# Altium PCB TempController.PcbDoc
Units mil, origin at the board's own origin, x right, y up, seen from the top; angles counter-clockwise.
Board outline 2362.2 x 3260 mil, 2 copper layers (Top Layer, Bottom Layer); 38 components, 36 nets, 136 pads, 5 vias.
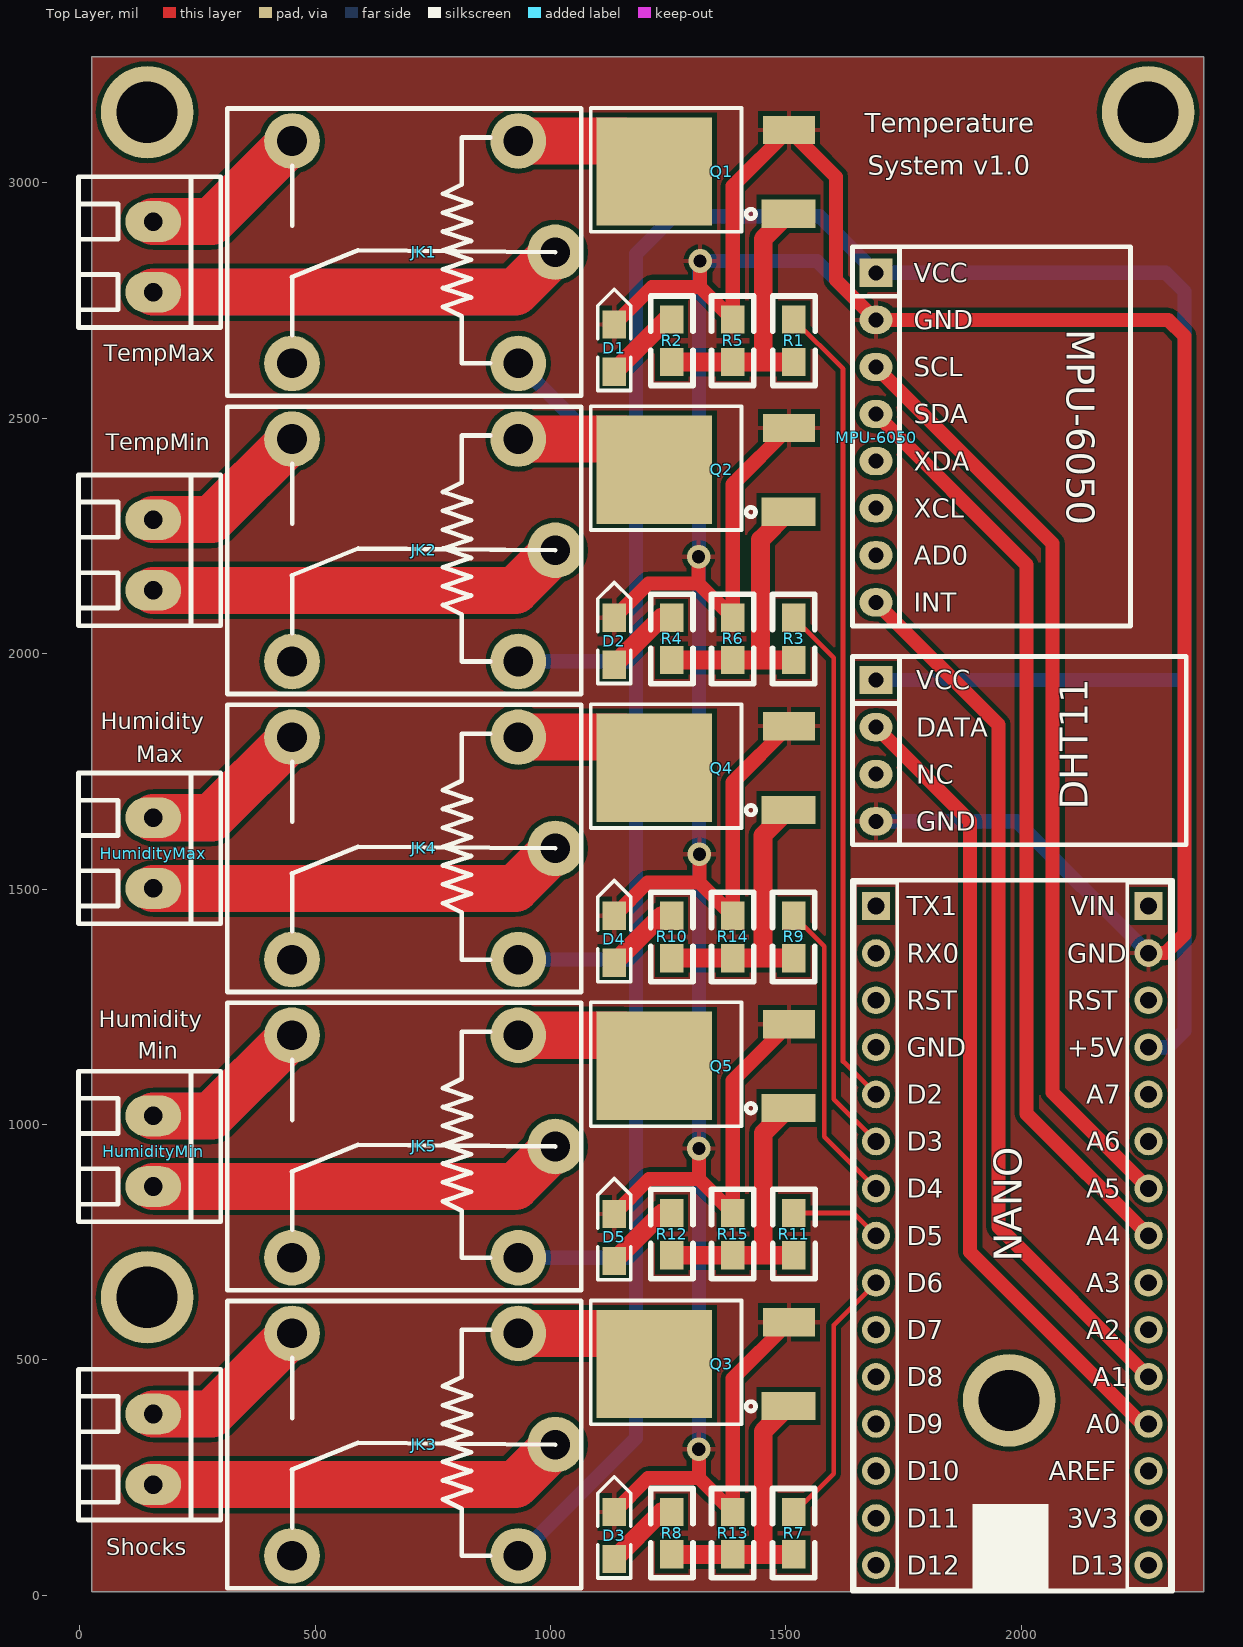
[diagram p0: Top Layer view]
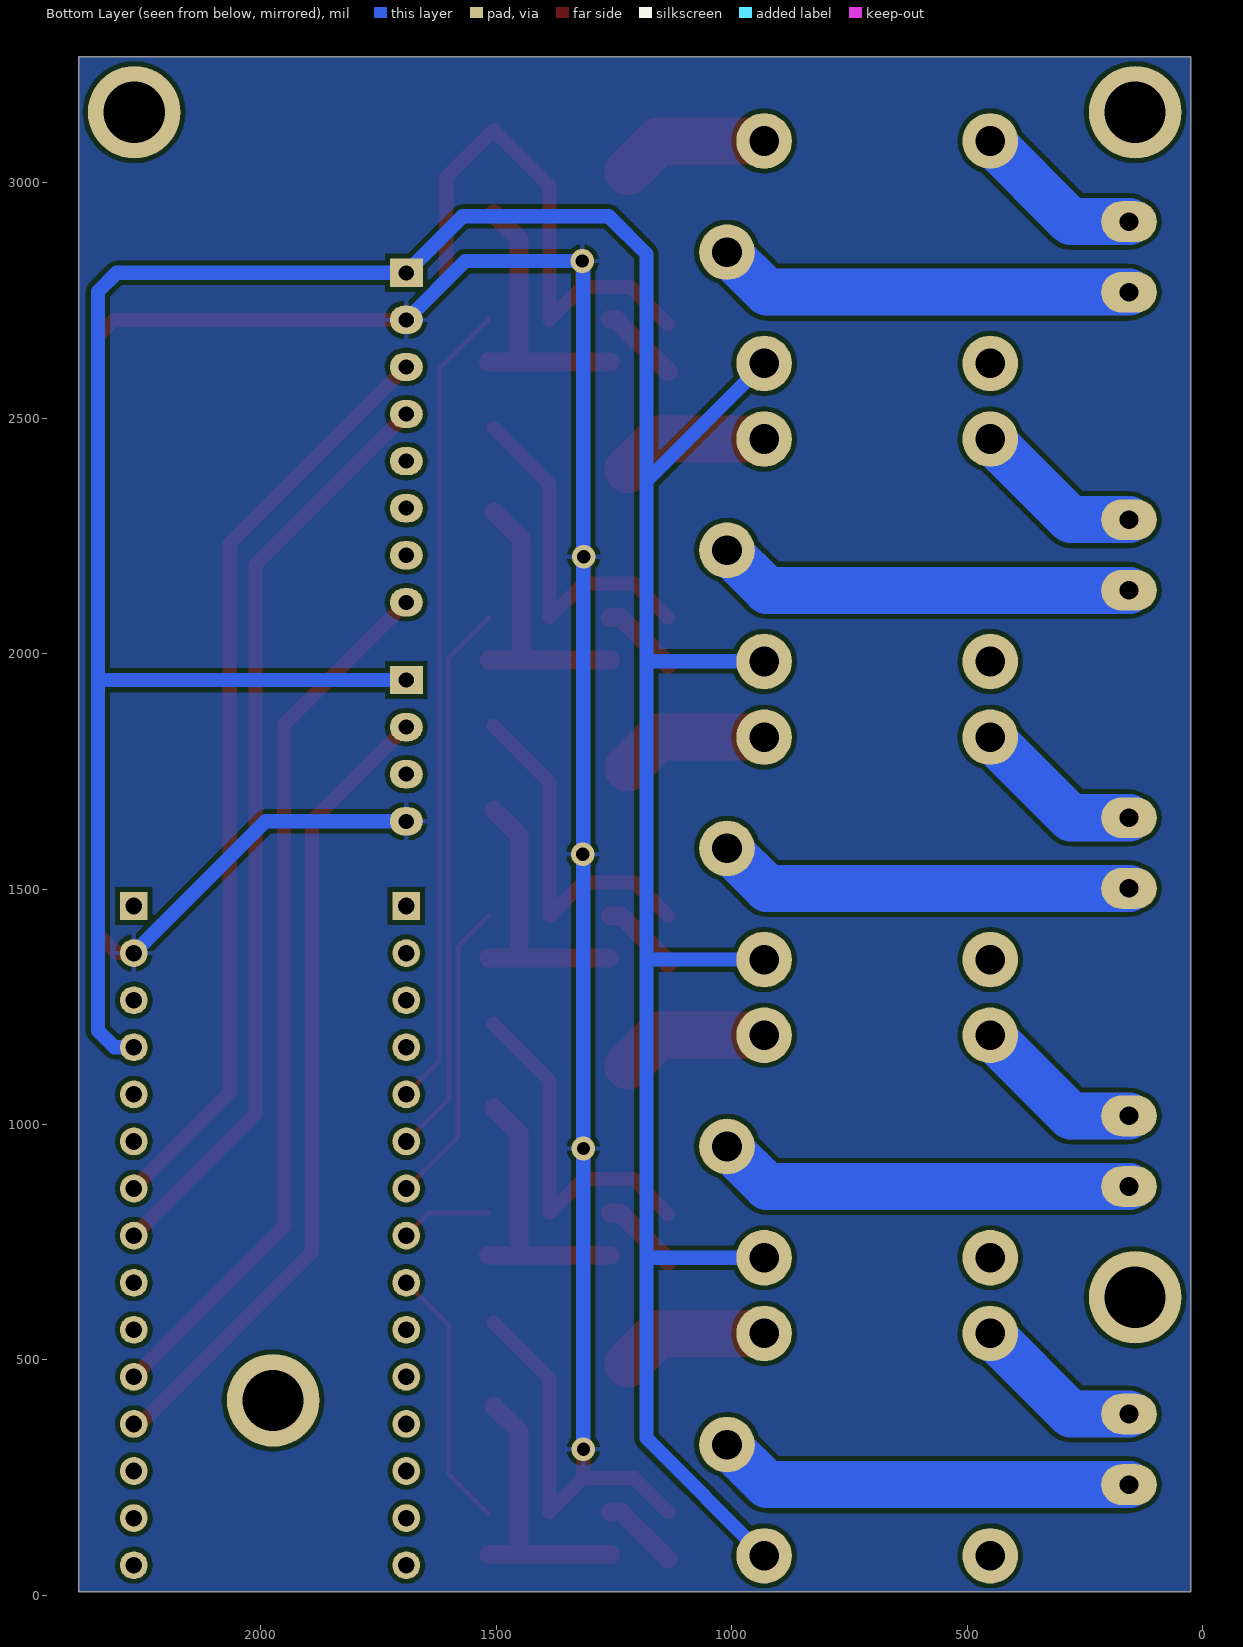
[diagram p1: Bottom Layer view, seen from below]

## Layer stack, top to bottom
Top Solder: solder mask 0.4, Solder Resist, Dk 3.5
Top Layer: signal copper 1.4
Dielectric 1: dielectric 12.6, FR-4, Dk 4.8
Bottom Layer: signal copper 1.4
Bottom Solder: solder mask 0.4, Solder Resist, Dk 3.5

## Board outline
25,8 25,3268 2387.2,3268 2387.2,8

## Design rules (kind name [scope] priority, off if disabled: settings)
Clearance [All] p1: gap=10 ignorepadtopadclearanceinfootprint=FALSE except(0: Arc-Hole Track-Hole SMDPad-Hole THPad-Hole Via-Hole Fill-Hole Poly-Hole Region-Hole Text-Hole)
PolygonConnect [All] p1: connectstyle=Relief reliefconductorwidth=10 reliefentries=4 polygonreliefangle="90 Angle" airgapwidth=10
RoutingVias [All] p1: holewidth=28 width=50 viastyle="Through Hole" minholewidth=28 minwidth=50 maxholewidth=28 maxwidth=50
SolderMaskExpansion [All] p1: expansion=4
Width [All] p1: maxlimit=300 minlimit=10 preferedwidth=20
30 further rules are at their usual default settings.

## Components (designator, comment, footprint, x,y, rotation, side; value= is the part's Value field where it differs from the comment)
D1 "LED" LED-0805Y 1135.14,2599 r90 top
D2 "LED" LED-0805Y 1135.14,1976.5 r90 top
D3 "LED" LED-0805Y 1135.14,77 r90 top
D4 "LED" LED-0805Y 1135.14,1343.33 r90 top
D5 "LED" LED-0805Y 1135.14,710.17 r90 top
DHT11 "DHT11" DHT11 1691.2,1944 r0 top
HumidityMax "KF301-2P" KF128-3.81-2P 156.2,1651.45 r270 top
HumidityMin "KF301-2P" KF128-3.81-2P 156.2,1018.28 r270 top
JK1 "SRD-05VDC-SL-C" SRD-C_B 931.2,2616.56 r180 top
JK2 "SRD-05VDC-SL-C" SRD-C_B 931.2,1983.39 r180 top
JK3 "SRD-05VDC-SL-C" SRD-C_B 931.2,83.9 r180 top
JK4 "SRD-05VDC-SL-C" SRD-C_B 931.2,1350.23 r180 top
JK5 "SRD-05VDC-SL-C" SRD-C_B 931.2,717.06 r180 top
MPU-6050 "MPU-6050" MPU-6050 1691.2,2809 r0 top
NANO "ArduinoNano" ArduinoNano 1691.2,1464 r0 top
Q1 "N-MOS" TO252 1505.43,2938.96 r90 top
Q2 "N-MOS" TO252 1505.43,2305.82 r90 top
Q3 "N-MOS" TO252 1505.43,406.4 r90 top
Q4 "N-MOS" TO252 1505.43,1672.68 r90 top
Q5 "N-MOS" TO252 1505.43,1039.54 r90 top
R1 "100Ω" 0805R 1516.87,2709.66 r270 top
R2 "1.8KΩ" 0805R 1257.54,2619.66 r90 top
R3 "100Ω" 0805R 1516.2,2076.5 r270 top
R4 "1.8KΩ" 0805R 1257.54,1986.5 r90 top
R5 "10KΩ" 0805R 1386.87,2619.66 r90 top
R6 "10KΩ" 0805R 1386.87,1986.5 r90 top
R7 "100Ω" 0805R 1516.2,177 r270 top
R8 "1.8KΩ" 0805R 1257.54,87 r90 top
R9 "100Ω" 0805R 1516.2,1443.33 r270 top
R10 "1.8KΩ" 0805R 1257.54,1353.33 r90 top
R11 "100Ω" 0805R 1516.87,812.17 r270 top
R12 "1.8KΩ" 0805R 1257.54,722.17 r90 top
R13 "10KΩ" 0805R 1386.87,87 r90 top
R14 "10KΩ" 0805R 1386.87,1353.33 r90 top
R15 "10KΩ" 0805R 1386.87,722.17 r90 top
Shocks "KF301-2P" KF128-3.81-2P 156.2,385.12 r270 top
TempMax "KF301-2P" KF128-3.81-2P 156.2,2917.78 r270 top
TempMin "KF301-2P" KF128-3.81-2P 156.2,2284.61 r270 top

## Footprints (in the part's own frame and the unit in brackets; to place one, negate y for a bottom-side part, rotate by r counter-clockwise, add the part's x,y. Pads: shape width x height; smd on the part's side, far side on the other; paste and mask are expansions set on the pad)
0805R [mil]
  rect 60x50 smd: 1(0,0) 2(90,0)
  silkscreen extent -50,-45 140,45, body extent 1,-25 80,25, height 15
ArduinoNano [mm]
  rect 1.5x1.5 hole 0.9: 1(0,0) 30(14.7,0)
  round 1.5 hole 0.9: 2(0,-2.54) 3(0,-5.08) 4(0,-7.62) 5(0,-10.16) 6(0,-12.7) 7(0,-15.24) 8(0,-17.78) 9(0,-20.32) 10(0,-22.86) 11(0,-25.4) 12(0,-27.94) 13(0,-30.48) 14(0,-33.02) 15(0,-35.56) 16(14.7,-35.56) 17(14.7,-33.02) 18(14.7,-30.48) 19(14.7,-27.94) 20(14.7,-25.4) 21(14.7,-22.86) 22(14.7,-20.32) 23(14.7,-17.78) 24(14.7,-15.24) 25(14.7,-12.7) 26(14.7,-10.16) 27(14.7,-7.62) 28(14.7,-5.08) 29(14.7,-2.54)
  silkscreen extent -1.27,-36.96 16,1.4, body extent -1.23,-36.95 15.97,1.4, height 3.2
DHT11 [mil]
  rect 70x60 hole 32: 1(0,0)
  oval 70x60 hole 32: 2(0,-100) 3(0,-200) 4(0,-300)
  silkscreen extent -50,-350 659,50, body extent -50,-350 50,50, height 336
KF128-3.81-2P [mm] "螺钉式接线端子，脚距3.81mm"
  oval 2.2x3 hole 1: 1(0,0) 2(3.81,0)
  silkscreen extent -2.41,-4.04 5.72,3.63, body extent -2.41,-3.83 5.71,3.57, height 8.55
LED-0805Y [mil]
  rect 60x50 smd: A(0,0) K(100,0)
  silkscreen extent -40,-35 175,35, body extent 11,-26 89,23, height 32
MPU-6050 [mil]
  rect 70x60 hole 32: 1(0,0)
  oval 70x60 hole 32: 2(0,-100) 3(0,-200) 4(0,-300) 5(0,-400) 6(0,-500) 7(0,-600) 8(0,-700)
  silkscreen extent -50,-750 541,55, body extent -49,-755 49,55, height 126
SRD-C_B [mm] "单刀双投"
  round 3 hole 1.6: 1(0,0) 2(0,-12) 3(-2,-6) 4(12.2,0) 5(12.2,-12)
  silkscreen extent -3.4,-13.75 15.7,1.75, body extent -3.33,-13.85 15.77,1.65, height 15.6
TO252 [mil] "252晶体管"
  rect 230x245 smd: D(85,285.35)
  rect 60x115 smd: G(-4.55,0.23)
  rect 60x110 smd: S(173.45,-0.77)
  silkscreen extent -43,70 220,420, body extent -41,5 215,375, height 91

## Part data
HumidityMax HumidityMin Shocks TempMax TempMin: library part KF128-2P
JK1 JK2 JK3 JK4 JK5: "5V一组转换"
Q1 Q2 Q3 Q4 Q5: "N沟道场效应管"
R1 R2 R3 R4 R5 R6 R7 R8 R9 R10 R11 R12 R13 R14 R15: library part RES

## Free pads (board coordinates)
  round 196.85 hole 129.92: 0(143.11,633) 0(143.11,3149.89) 0(1974,414) 0(2269.09,3149.89)

## Via types
v1: diameter 50, hole 28, Top Layer to Bottom Layer, 5 vias

## Nets (pads, with @x,y where several pads share a name; then routed paths per layer and width w, separated by ;. In a path a pad name is that pad's centre, name@x,y a point inside that pad or via, vN(x,y) a via of type N, cw(c..) or ccw(c..) an arc to the next point about the centre after c; other vN are vias at no path point)
A0: DHT11.2 NANO.19 | length 1727.8
  Top Layer w30: DHT11.2 1891.2,1644 1891.2,729 2256.2,364 NANO.19
A1: MPU-6050.8 NANO.20 | length 1884.7
  Top Layer w30: MPU-6050.8 1951.2,1849 1951.2,782.74 NANO.20
D2: NANO.5 R1.1 | length 1717.9
  Top Layer w10: R1.1 1621.2,2605.33 1621.2,1134 NANO.5
D3: NANO.6 R3.1 | length 1185
  Top Layer w10: R3.1 1601.2,1991.5 1601.2,1054 NANO.6
D4: NANO.7 R9.1 | length 651.8
  Top Layer w10: R9.1 1581.2,1378.33 1581.2,974 NANO.7
D5: NANO.8 R11.1 | length 194.3
  Top Layer w10: R11.1 1643.04,812.17 NANO.8
D6: NANO.9 R7.1 | length 562.2
  Top Layer w10: R7.1@1516.87,174 1601.2,258.33 1601.2,574 NANO.9
GND: D1.K D2.K D3.K D4.K D5.K DHT11.4 MPU-6050.2 NANO.29 Q1.S Q2.S Q3.S Q4.S Q5.S R5.2 R6.2 R13.2 R14.2 R15.2 | length 10275.8
  Top Layer w30: D3.K 1207.14,249 1314.87,249 ; D5.K 1208.98,884 1315.04,884 ; D4.K 1205.81,1514 1316.2,1514 ; D2.K 1207.65,2149 1314.37,2149 ; D1.K 1215.14,2779 1317.53,2779 ; v1(1314.37,2205.84) 1314.37,2149 ; v1(1314.87,310.33) 1314.87,249 ; v1(1315.04,949) 1315.04,884 ; v1(1316.2,1574) 1316.2,1514 ; v1(1317.53,2834) 1317.53,2779 ; Q3.S 1386.87,460.52 R13.2 1314.87,249 ; Q5.S 1386.87,1093.66 R15.2 1315.04,884 ; Q4.S 1386.87,1726.8 R14.2 1316.2,1514 ; Q2.S 1386.87,2359.94 R6.2 1314.37,2149 ; NANO.29 2306.2,1364 2346.2,1404 2346.2,2674.66 2311.87,2709 MPU-6050.2 1690.85,2709 1606.2,2793.64 1606.2,3012.41 Q1.S 1386.87,2993.08 R5.2 1317.53,2779
  Bottom Layer w30: v1@1311.2,2209 v1(1314.37,2205.84) ; v1(1314.87,310.33) 1315.19,310.33 1315.19,1574 v1@1315.19,2205.84 ; v1@1315.19,2209 1315.19,2831.66 v1(1317.53,2834) 1565.85,2834 1690.85,2709 MPU-6050.2 ; DHT11.4 1989.94,1644 NANO.29
NetD1_A: D1.A R2.2 | length 168.2
  Top Layer w40: D1.A 1245.8,2709.66 R2.2
NetD2_A: D2.A R4.2 | length 163.8
  Top Layer w40: D2.A 1235.14,2076.5 R4.2
NetD3_A: D3.A R8.2 | length 163.8
  Top Layer w40: D3.A 1235.14,177 R8.2
NetD4_A: D4.A R10.2 | length 163.8
  Top Layer w40: D4.A 1235.14,1443.33 R10.2
NetD5_A: D5.A R12.2 | length 164.6
  Top Layer w40: D5.A 1237.14,812.17 R12.2
NetHumidityMax_1: HumidityMax.1 JK4.5 | length 731.2
  Top Layer w100: HumidityMax.1 279.67,1651.45 JK4.5
  Bottom Layer w100: HumidityMax.1 279.67,1651.45 JK4.5
NetHumidityMax_2: HumidityMax.2 JK4.3 | length 1777.9
  Top Layer w100: HumidityMax.2 924.94,1501.45 JK4.3
  Bottom Layer w100: HumidityMax.2 924.94,1501.45 JK4.3
NetHumidityMin_1: HumidityMin.1 JK5.5 | length 731.2
  Top Layer w100: HumidityMin.1 279.67,1018.28 JK5.5
  Bottom Layer w100: HumidityMin.1 279.67,1018.28 JK5.5
NetHumidityMin_2: HumidityMin.2 JK5.3 | length 1777.9
  Top Layer w100: HumidityMin.2 924.94,868.28 JK5.3
  Bottom Layer w100: HumidityMin.2 924.94,868.28 JK5.3
NetJK1_2: JK1.2 Q1.D | length 315.8
  Top Layer w100: JK1.2 1155.04,3089 Q1.D
NetJK1_3: JK1.3 TempMax.2 | length 1777.9
  Top Layer w100: TempMax.2 924.94,2767.78 JK1.3
  Bottom Layer w100: TempMax.2 924.94,2767.78 JK1.3
NetJK1_5: JK1.5 TempMax.1 | length 731.2
  Top Layer w100: TempMax.1 279.67,2917.78 JK1.5
  Bottom Layer w100: TempMax.1 279.67,2917.78 JK1.5
NetJK2_2: JK2.2 Q2.D | length 315.8
  Top Layer w100: JK2.2 1155.06,2455.83 Q2.D
NetJK2_3: JK2.3 TempMin.2 | length 1777.9
  Top Layer w100: TempMin.2 924.94,2134.61 JK2.3
  Bottom Layer w100: TempMin.2 924.94,2134.61 JK2.3
NetJK2_5: JK2.5 TempMin.1 | length 731.2
  Top Layer w100: TempMin.1 279.67,2284.61 JK2.5
  Bottom Layer w100: TempMin.1 279.67,2284.61 JK2.5
NetJK3_2: JK3.2 Q3.D | length 315.8
  Top Layer w100: JK3.2 1155.14,556.34 Q3.D
NetJK3_3: JK3.3 Shocks.2 | length 1777.9
  Top Layer w100: Shocks.2 924.94,235.12 JK3.3
  Bottom Layer w100: Shocks.2 924.94,235.12 JK3.3
NetJK3_5: JK3.5 Shocks.1 | length 731.2
  Top Layer w100: Shocks.1 279.67,385.12 JK3.5
  Bottom Layer w100: Shocks.1 279.67,385.12 JK3.5
NetJK4_2: JK4.2 Q4.D | length 315.8
  Top Layer w100: JK4.2 1155.09,1822.67 Q4.D
NetJK5_2: JK5.2 Q5.D | length 315.8
  Top Layer w100: JK5.2 1155.12,1189.5 Q5.D
NetQ1_G: Q1.G R1.2 R2.1 R5.1 | length 596.2
  Top Layer w40: R2.1 R5.1 1451.87,2619.66 ; Q1.G 1451.87,2881.08 1451.87,2619.66 ; R1.2 1451.87,2619.66
NetQ2_G: Q2.G R3.2 R4.1 R6.1 | length 597.9
  Top Layer w40: R4.1 R6.1 1446.2,1986.5 ; Q2.G 1446.2,2242.27 1446.2,1986.5 ; R3.2 1446.2,1986.5
NetQ3_G: Q3.G R7.2 R8.1 R13.1 | length 595.7
  Top Layer w40: R8.1 R13.1 1451.54,87 ; Q3.G 1451.54,348.18 1451.54,87 ; R7.2 1451.54,87
NetQ4_G: Q4.G R9.2 R10.1 R14.1 | length 596.9
  Top Layer w40: R10.1@1260.64,1353.33 1441.2,1353.33 ; Q4.G 1451.2,1614.13 1451.2,1363.33 1441.2,1353.33 ; R9.2 1441.2,1353.33
NetQ5_G: Q5.G R11.2 R12.1 R15.1 | length 594.3
  Top Layer w40: R12.1 R15.1 1451.87,722.17 ; Q5.G 1451.87,981.66 1451.87,722.17 ; R11.2 1451.87,722.17
SCL: MPU-6050.3 NANO.24 | length 1984.7
  Top Layer w30: MPU-6050.3 2066.2,2234 2066.2,1067.74 NANO.24
SDA: MPU-6050.4 NANO.23 | length 1984.7
  Top Layer w30: MPU-6050.4 2011.2,2189 2011.2,1022.74 NANO.23
VCC: DHT11.1 JK1.1 JK2.1 JK3.1 JK4.1 JK5.1 MPU-6050.1 NANO.27 | length 7554.4
  Bottom Layer w30: JK3.1 1181.2,333.9 1181.2,714 ; JK5.1 1178.14,717.06 1181.2,714 ; JK4.1 1179.98,1350.23 1181.2,1349 ; JK2.1 931.81,1984 1181.2,1984 ; JK1.1 1181.2,2366.56 ; DHT11.1 2346.2,1944 ; NANO.27 2311.2,1164 2346.2,1199 2346.2,1944 ; 1181.2,714 1181.2,1349 ; 1181.2,1349 1181.2,1984 ; 1181.2,1984 1181.2,2366.56 ; 1181.2,2366.56 1181.2,2849 1261.2,2929 1571.2,2929 MPU-6050.1 2306.2,2809 2346.2,2769 2346.2,1944
pads on no net: DHT11.3 JK1.4 JK2.4 JK3.4 JK4.4 JK5.4 MPU-6050.5 MPU-6050.6 MPU-6050.7 NANO.1 NANO.2 NANO.3 NANO.4 NANO.10 NANO.11 NANO.12 NANO.13 NANO.14 NANO.15 NANO.16 NANO.17 NANO.18 NANO.21 NANO.22 NANO.25 NANO.26 NANO.28 NANO.30

## Polygon pours and split planes (outlines as drawn)
GND on Bottom Layer "Bottom Layer-GND" (solid, pour order 4): 25,3268 2387.2,3268 2387.2,8.2 2387,8 25,8
GND on Top Layer "Top Layer-GND" (solid, pour order 12): 25,7 26,8 2387.5,8 2387.5,3268.5 24.5,3268.5
GND on Top Layer "Top Layer-GND 1" (solid, pour order 6): 25,7

## Silkscreen, mask and mechanical layers (free items; w line width, h text height)
Top Overlay:
  text "Temperature" at 1667.2,3108 h40
  text "System v1.0" at 1673.2,3017 h40
  text "Humidity" at 44.2,1839 h35
  text "Max" at 120.2,1769 h35
  text "Humidity" at 40.2,1207 h35
  text "Min" at 123.2,1140 h35
Mechanical 1:
  the board outline again, w10

## Text inside footprints (layer, text, board x,y; h text height)
DHT11: Top Overlay "VCC" at 1776.2,1924 h40; Top Overlay "DATA" at 1776.2,1824 h40; Top Overlay "NC" at 1776.2,1724 h40; Top Overlay "GND" at 1776.2,1624 h40
MPU-6050: Top Overlay "VCC" at 1771.2,2789 h40; Top Overlay "GND" at 1771.2,2689 h40; Top Overlay "SCL" at 1771.2,2589 h40; Top Overlay "SDA" at 1771.2,2489 h40; Top Overlay "XDA" at 1771.2,2389 h40; Top Overlay "XCL" at 1771.2,2289 h40; Top Overlay "AD0" at 1771.2,2189 h40; Top Overlay "INT" at 1771.2,2089 h40
NANO: Top Overlay "TX1" at 1756.2,1444 h40; Top Overlay "RX0" at 1756.2,1344 h40; Top Overlay "RST" at 1756.2,1244 h40; Top Overlay "GND" at 1756.2,1144 h40; Top Overlay "D2" at 1756.2,1044 h40; Top Overlay "D3" at 1756.2,944 h40; Top Overlay "D4" at 1756.2,844 h40; Top Overlay "D5" at 1756.2,744 h40; Top Overlay "D6" at 1756.2,644 h40; Top Overlay "D7" at 1756.2,544 h40; Top Overlay "D8" at 1756.2,444 h40; Top Overlay "D9" at 1756.2,344 h40; Top Overlay "D10" at 1756.2,244 h40; Top Overlay "D11" at 1756.2,144 h40; Top Overlay "D12" at 1756.2,44 h40; Top Overlay "VIN" at 2104.53,1444 h40; Top Overlay "GND" at 2097.87,1344 h40; Top Overlay "RST" at 2097.87,1244 h40; Top Overlay "+5V" at 2097.87,1144 h40; Top Overlay "A7" at 2137.85,1044 h40; Top Overlay "A6" at 2137.85,944 h40; Top Overlay "A5" at 2137.85,844 h40; Top Overlay "A4" at 2137.85,744 h40; Top Overlay "A3" at 2137.85,644 h40; Top Overlay "A2" at 2137.85,544 h40; Top Overlay "A1" at 2151.18,444 h40; Top Overlay "A0" at 2137.85,344 h40; Top Overlay "AREF" at 2057.88,244 h40; Top Overlay "3V3" at 2097.87,144 h40; Top Overlay "D13" at 2104.53,44 h40